# Altium PCB brake-box.PcbDoc
Units mm, origin at the board's own origin, x right, y up, seen from the top; angles counter-clockwise.
Board outline 82.91 x 56.86 mm, 2 copper layers (Top Layer, Bottom Layer); 10 components, 6 nets, 31 pads, 4 vias.
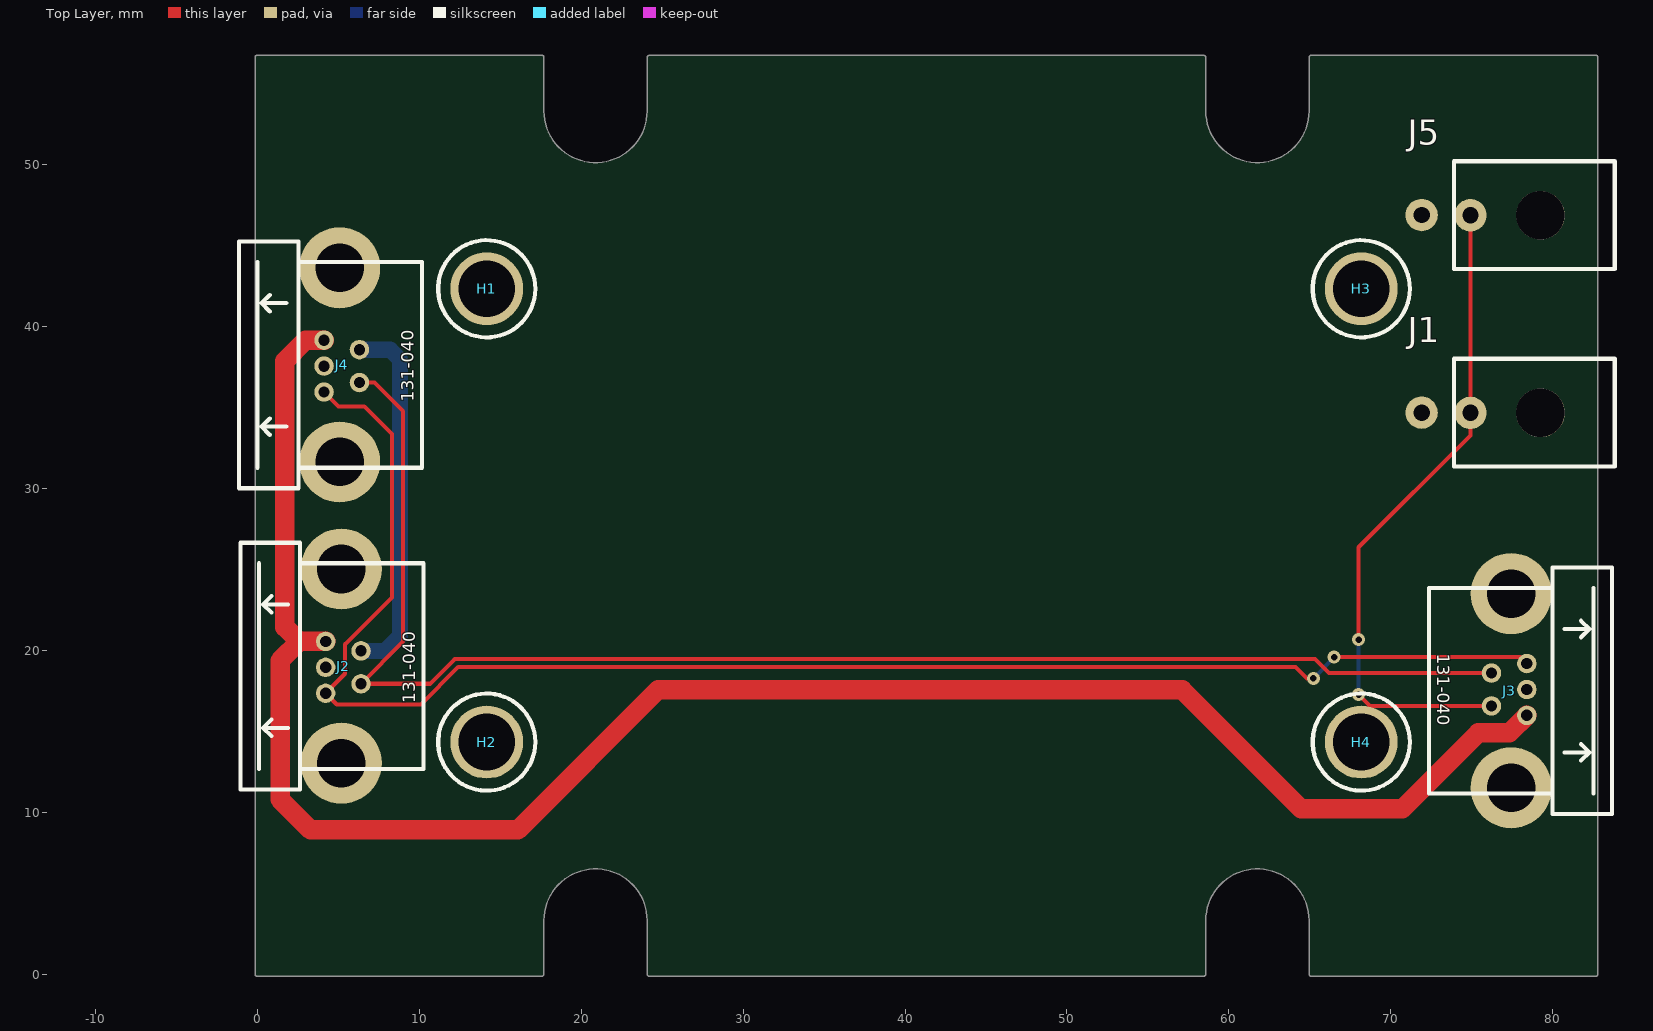
[diagram p0: Top Layer view]
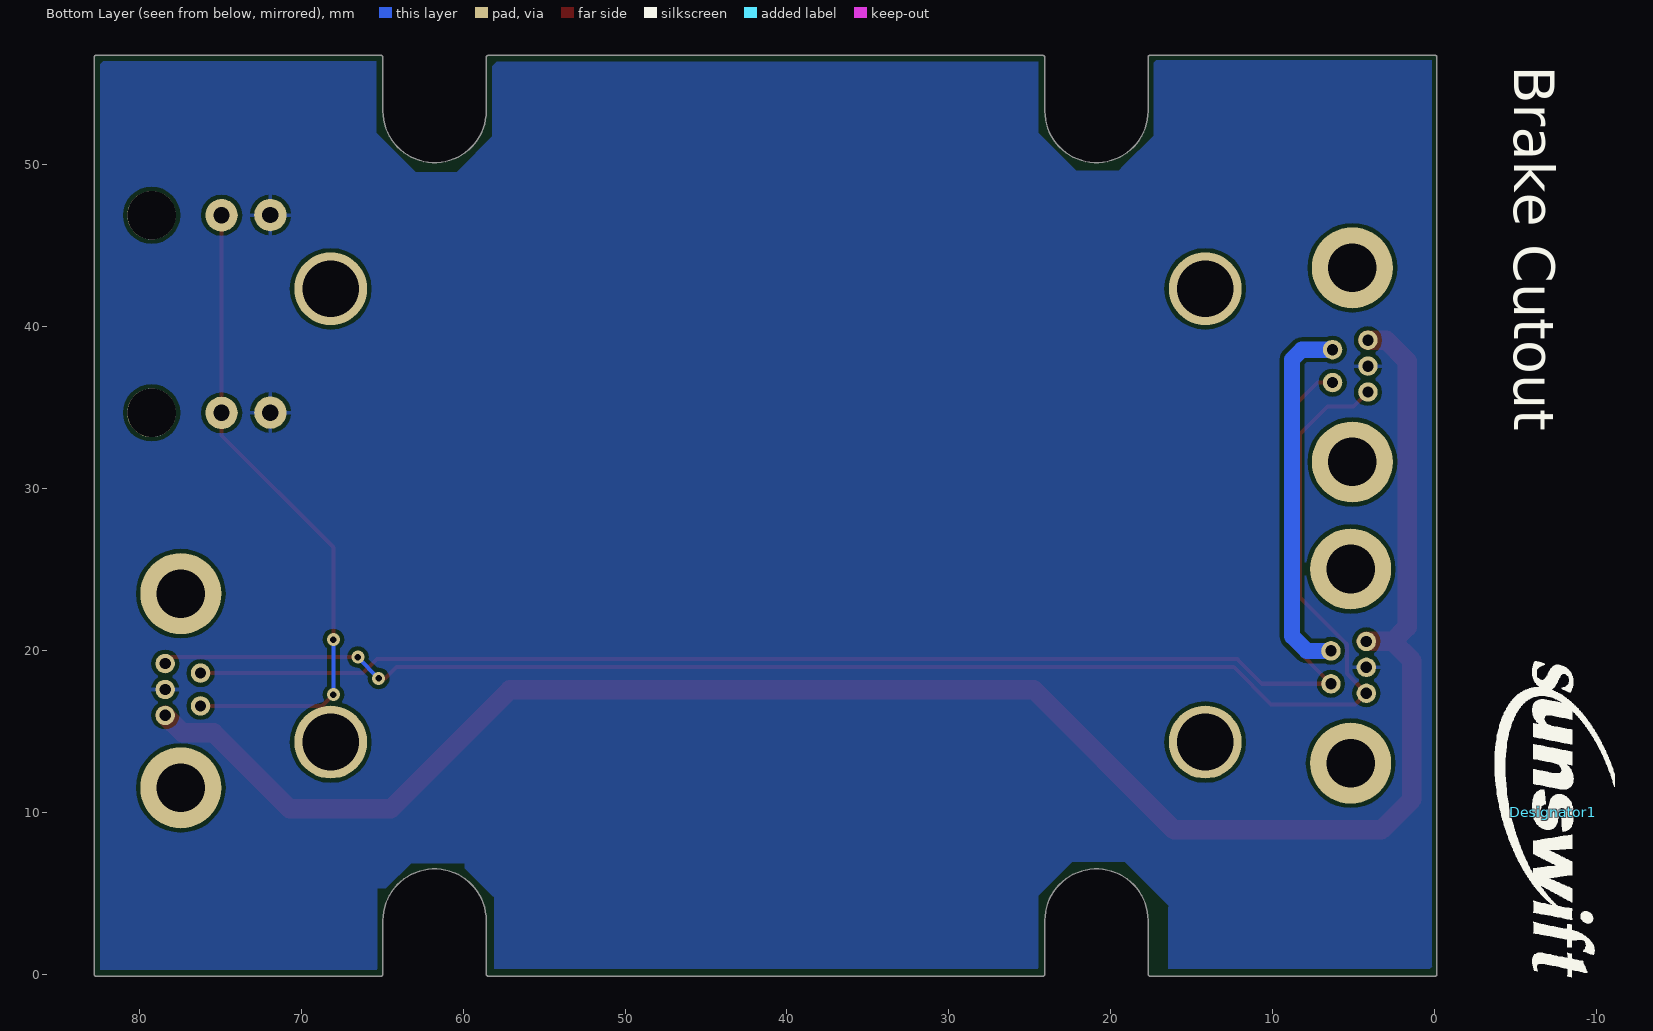
[diagram p1: Bottom Layer view, seen from below]

## Layer stack, top to bottom
Top Layer: signal copper 0.0356
Dielectric: dielectric 0.32, FR-4, Dk 4.8
Bottom Layer: signal copper 0.0356

## Board outline
-0.132,-0.005 ccw(c-0.005,-0.005) 0.03,-0.127 17.575,-0.127 ccw(c17.575,0) 17.702,0 17.702,3.31 cw(c20.89,3.31) 24.078,3.31 24.078,0 ccw(c24.205,0) 24.205,-0.127 58.445,-0.127 ccw(c58.445,0) 58.572,0 58.572,3.31 cw(c61.76,3.31) 64.948,3.31 64.948,0 ccw(c65.075,0) 64.987,-0.093 ccw(c65.08,-0.005) 65.08,-0.132 82.655,-0.132 ccw(c82.655,-0.005) 82.782,-0.005 82.782,56.605 ccw(c82.655,56.605) 82.62,56.727 65.075,56.727 ccw(c65.075,56.6) 64.948,56.6 64.948,53.29 cw(c61.76,53.29) 58.572,53.29 58.572,56.6 ccw(c58.445,56.6) 58.445,56.727 24.205,56.727 ccw(c24.205,56.6) 24.078,56.6 24.078,53.29 cw(c20.89,53.29) 17.702,53.29 ccw(c17.575,53.29) 17.702,53.293 ccw(c17.575,53.295) 17.702,53.295 17.702,56.605 ccw(c17.575,56.605) 17.575,56.732 -0.005,56.732 ccw(c-0.005,56.605) -0.132,56.605

## Design rules (kind name [scope] priority, off if disabled: settings)
Clearance [All] p1: gap=0.254
PolygonConnect [All] p1: connectstyle=Relief reliefconductorwidth=0.254 reliefentries=4 polygonreliefangle="90 Angle"
RoutingVias [All] p1: holewidth=0.711 width=1.27 viastyle="Through Hole" minholewidth=0.711 minwidth=1.27 maxholewidth=0.711 maxwidth=1.27
SilkscreenOverComponentPads [All] p1: minsilkscreentomaskgap=0.254
SolderMaskExpansion [All] p1: expansion=0.102
Width [All] p1: maxlimit=5 minlimit=0.254 preferedwidth=0.254
27 further rules are at their usual default settings.

## Classes and differential pairs
component class BrakeBox: J1 J2 J3 J4 J5

## Components (designator, comment, footprint, x,y, rotation, side; value= is the part's Value field where it differs from the comment)
Designator1 "Comment" SUNSWIFTLOGO -7.3,10 r270 bottom
H1 "HOLE" M2.5 14.173,42.316 r0 top
H2 "HOLE" M2.5 14.173,14.326 r0 top
H3 "HOLE" M2.5 68.174,42.316 r0 top
H4 "HOLE" M2.5 68.174,14.326 r0 top
J1 "CON2" MICROFIT-2 74.911,34.656 r90 top
J2 "CON5" TRIAD5F 6.411,19.956 r90 top
J3 "CON5" TRIAD5F 76.211,16.556 r270 top
J4 "CON5" TRIAD5F 6.311,38.556 r90 top
J5 "CON2" MICROFIT-2 74.911,46.856 r90 top

## Footprints (in the part's own frame and the unit in brackets; to place one, negate y for a bottom-side part, rotate by r counter-clockwise, add the part's x,y. Pads: shape width x height; smd on the part's side, far side on the other; paste and mask are expansions set on the pad)
M2.5 [mm]
  round 4.5 hole 3.5: 1(0,0)
  silkscreen extent -3,-3 3,3
MICROFIT-2 [mm]
  round 3 hole 3 unplated: 0(0,-4.32)
  round 2 hole 1: 1(0,0) 2(0.01,3.01)
  silkscreen extent -3.31,-8.91 3.33,1.01, body extent -3.55,-8.9 3.6,3.34, height 2.61
SUNSWIFTLOGO [mm] "Sunswift Logo"
  silkscreen extent -9.32,-3.58 10.19,3.81
TRIAD5F [mm]
  round 5 hole 3: 0(-6.934,1.219) 0(5.055,1.219)
  round 1.2 hole 0.7: 1(0,0) 2(0.584,2.184) 3(-1.016,2.184) 4(-2.616,2.184) 5(-2.032,0)
  silkscreen extent -8.56,-3.86 6.68,7.44

## Part data
H1 H2 H3 H4: "Hole"
J2 J3 J4: "Connector"

## Via types
v1: diameter 0.8, hole 0.4, Top Layer to Bottom Layer, 4 vias

## Nets (pads, with @x,y where several pads share a name; then routed paths per layer and width w, separated by ;. In a path a pad name is that pad's centre, name@x,y a point inside that pad or via, vN(x,y) a via of type N, cw(c..) or ccw(c..) an arc to the next point about the centre after c; other vN are vias at no path point)
5V: J2.1 J4.1 | length 22.6
  Bottom Layer w1: J4.1 8.211,38.556 8.811,37.956 8.811,20.856 7.911,19.956 J2.1
12V: J2.2 J3.2 J4.2 | length 119.3
  Top Layer w1.2: J4.2 2.995,39.14 1.711,37.856 1.711,21.425 2.595,20.54 ; J2.2 2.595,20.54 ; J3.2 77.323,14.9 75.4,14.9 70.7,10.2 64.467,10.2 57.111,17.556 24.756,17.556 16.1,8.9 3.3,8.9 1.411,10.789 1.411,19.356 2.595,20.54
BRAKECUTOUT: J1.1 J3.1 J5.1 | length 40.9
  Top Layer w0.254: v1(68.011,17.256) 68.711,16.556 J3.1 ; v1(68.011,20.656) 68.011,26.356 74.911,33.256 J1.1 J5.1
  Bottom Layer w0.254: v1(68.011,17.256) v1(68.011,20.656)
CAN_H: J2.4 J3.4 J4.4 | length 99.4
  Top Layer w0.254: J4.4 5.01,35.056 6.611,35.056 8.311,33.356 8.311,23.244 5.43,20.363 5.43,18.543 J2.4 4.91,16.656 10.111,16.656 12.411,18.956 64.111,18.956 64.811,18.256 v1(65.211,18.256) ; v1(66.498,19.569) 77.998,19.569 J3.4
  Bottom Layer w0.254: v1(65.211,18.256) 66.498,19.543 v1(66.498,19.569)
CAN_L: J2.5 J3.5 J4.5 | length 92.1
  Top Layer w0.254: J4.5 7.243,36.524 9.011,34.756 9.011,20.524 J2.5 10.66,17.924 12.2,19.464 65.303,19.464 66.179,18.588 J3.5
GND: J1.2 J2.3 J3.3 J4.3 J5.2
pads on no net: H1.1 H2.1 H3.1 H4.1 J1.0 J2.0 J3.0 J4.0 J5.0

## Polygon pours and split planes (outlines as drawn)
GND on Bottom Layer "GNDPLANE" (solid, remove dead copper, pour order 1001): 0.195,56.422 17.213,56.422 17.264,56.372 17.365,56.27 17.365,51.8 17.365,51.774 19.194,49.945 19.524,49.615 22.09,49.615 22.14,49.615 24.426,51.901 24.477,51.952 24.477,56.321 57.929,56.321 58.183,56.067 58.183,52.104 58.183,51.723 60.24,49.666 60.393,49.514 62.907,49.514 65.295,51.901 65.346,51.952 65.346,56.372 82.211,56.372 82.415,56.168 82.415,0.263 65.244,0.263 65.295,0.314 65.295,5.292 64.762,5.292 63.212,6.842 59.885,6.842 59.885,6.537 58.183,4.835 58.081,4.733 58.081,0.314 24.376,0.314 24.477,0.415 24.477,3.895 24.477,4.835 22.42,6.892 22.369,6.943 19.296,6.943 19.143,6.943 16.4,4.2 16.451,4.149 16.451,0.314 0.296,0.314 0.144,0.466 0.195,0.517 0.195,56.422

## Silkscreen, mask and mechanical layers (free items; w line width, h text height)
Top Overlay:
  region: 90.2,56.825 90.2,0.225 91.8,0.225 91.8,56.825
  text "SUITS HAMMOND MFG 1593L" at 87.15,34.448 h1.52 r270
Bottom Overlay:
  text "Brake Cutout" at -4.9,56.1 h2.5 r90
Mechanical 1:
  circle w0.254: c99.8,17.7 r6.6
  circle w0.254: c-17.2,38 r6.6
  circle w0.254: c-17.2,18.3 r6.6
  circle w0.254: c14.325,42.3 r1.602
  circle w0.254: c68.325,42.3 r1.602
  circle w0.254: c68.325,14.3 r1.602
  circle w0.254: c14.325,14.3 r1.602
  lines w0.254: -0.005,-0.005 -0.005,56.605 17.575,56.605 17.575,53.295 ; 0,0 17.575,0 17.575,3.31 cw(c20.89,3.31) 24.205,3.31 24.205,0 58.445,0 58.445,3.31 cw(c61.76,3.31) 65.075,3.31 65.075,0 ; 17.575,53.29 ccw(c20.89,53.29) 24.205,53.29 24.205,56.6 58.445,56.6 58.445,53.29 ccw(c61.76,53.29) 65.075,53.29 65.075,56.6 82.65,56.6 ; 65.08,-0.005 82.655,-0.005 82.655,56.605 ; -25.45,-1.7 -2.75,-1.7 -2.75,58.3 -25.45,58.3 -25.45,31.31 -25.45,-1.7 ; 85.35,-1.6 85.35,58.4 108.05,58.4 108.05,25.39 108.05,-1.6 85.35,-1.6 ; 91.763,43.023 91.763,50.515 102.314,50.515 102.314,43.023 91.763,43.023 ; 91.853,31.018 102.404,31.018 102.404,38.51 91.853,38.51 91.853,31.018

## Text inside footprints (layer, text, board x,y; h text height)
J2: Top Overlay "131-040" at 9.764,16.73 h0.76 r90
J3: Top Overlay "131-040" at 72.858,19.782 h0.76 r270
J4: Top Overlay "131-040" at 9.664,35.33 h0.76 r90